# Altium PCB HKCitVDR_PCB.PcbDoc
Units mil, origin at the board's own origin, x right, y up, seen from the top; angles counter-clockwise.
Board outline 6000 x 2500 mil, 4 copper layers (GND, Signal Layer 1, Signal Layer 2, GND (Bottom)), stack 38.234 mil thick; 38 components, 19 nets, 60 pads, 44 vias.
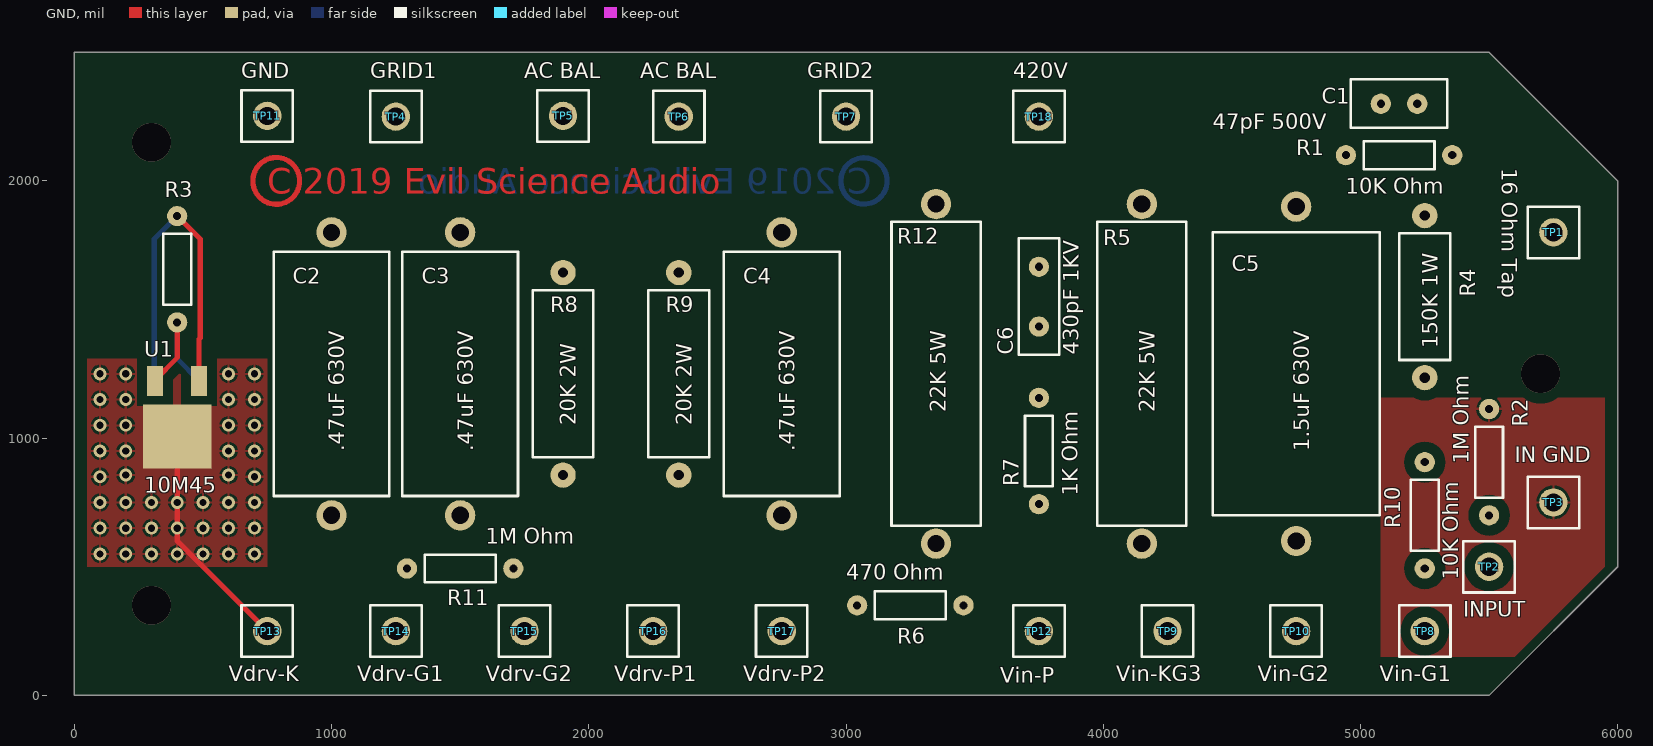
[diagram p0: GND view]
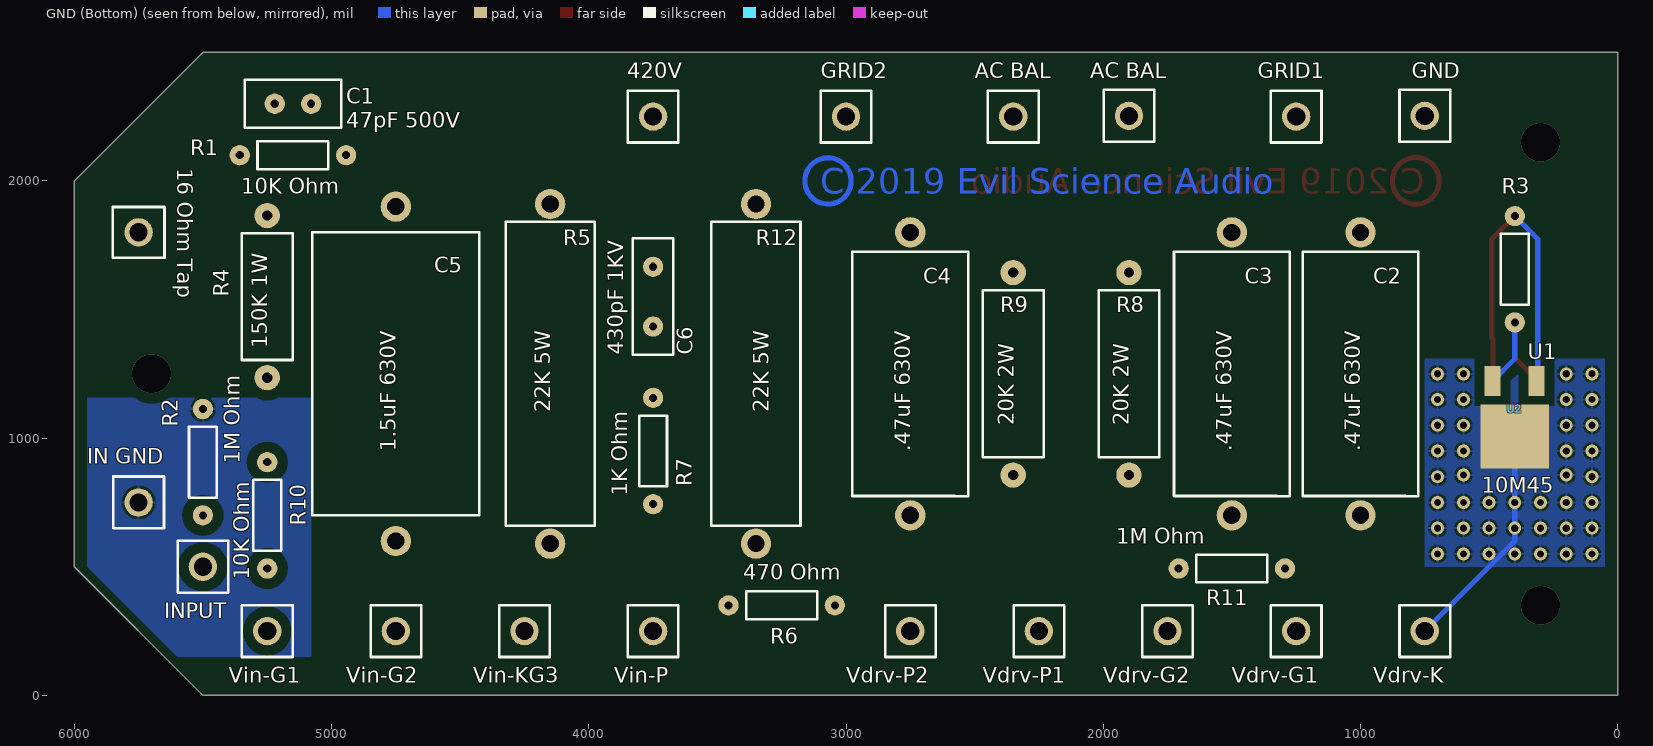
[diagram p1: GND (Bottom) view, seen from below]
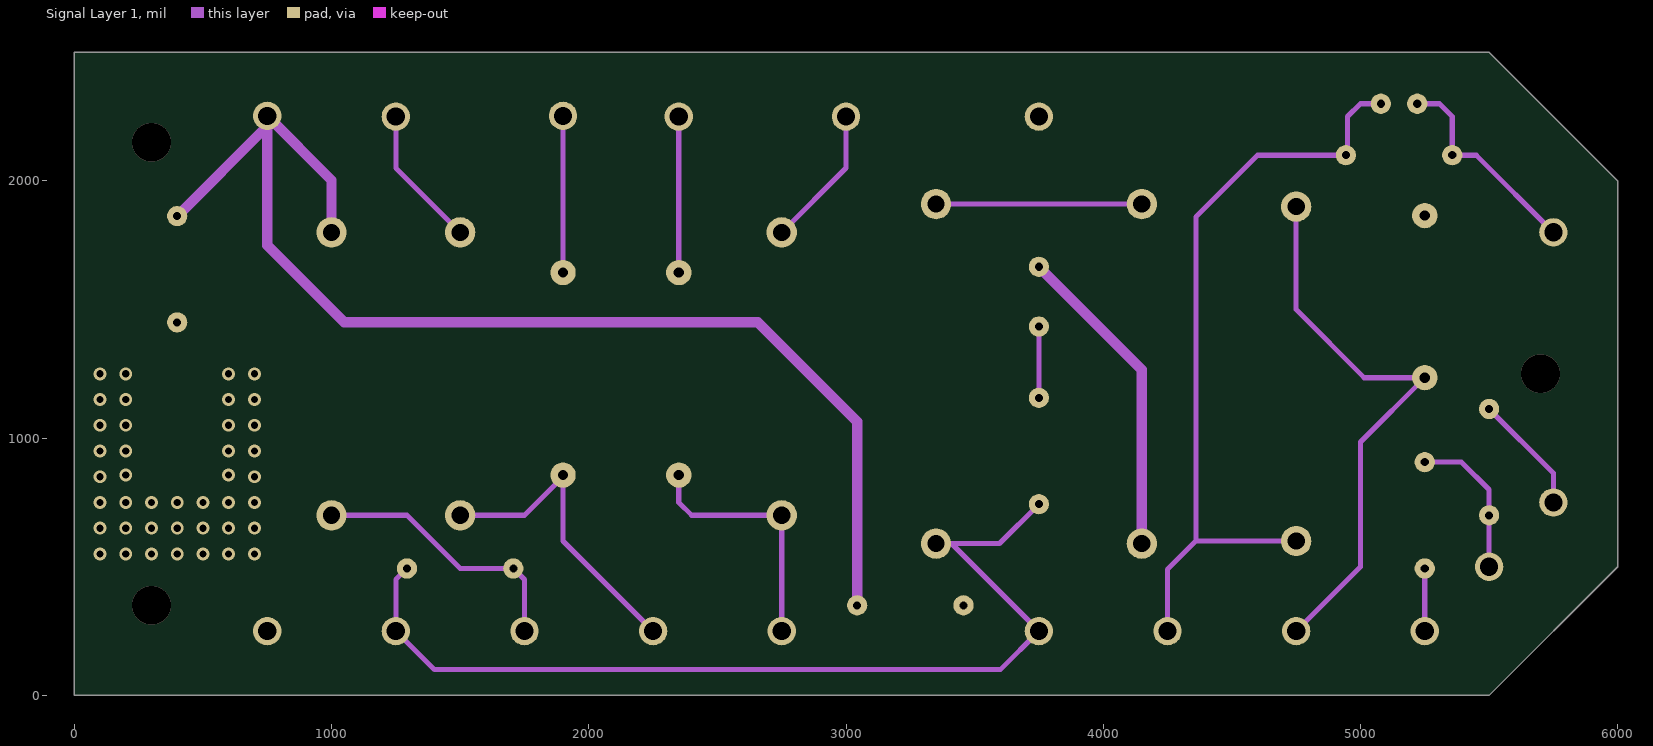
[diagram p2: Signal Layer 1]
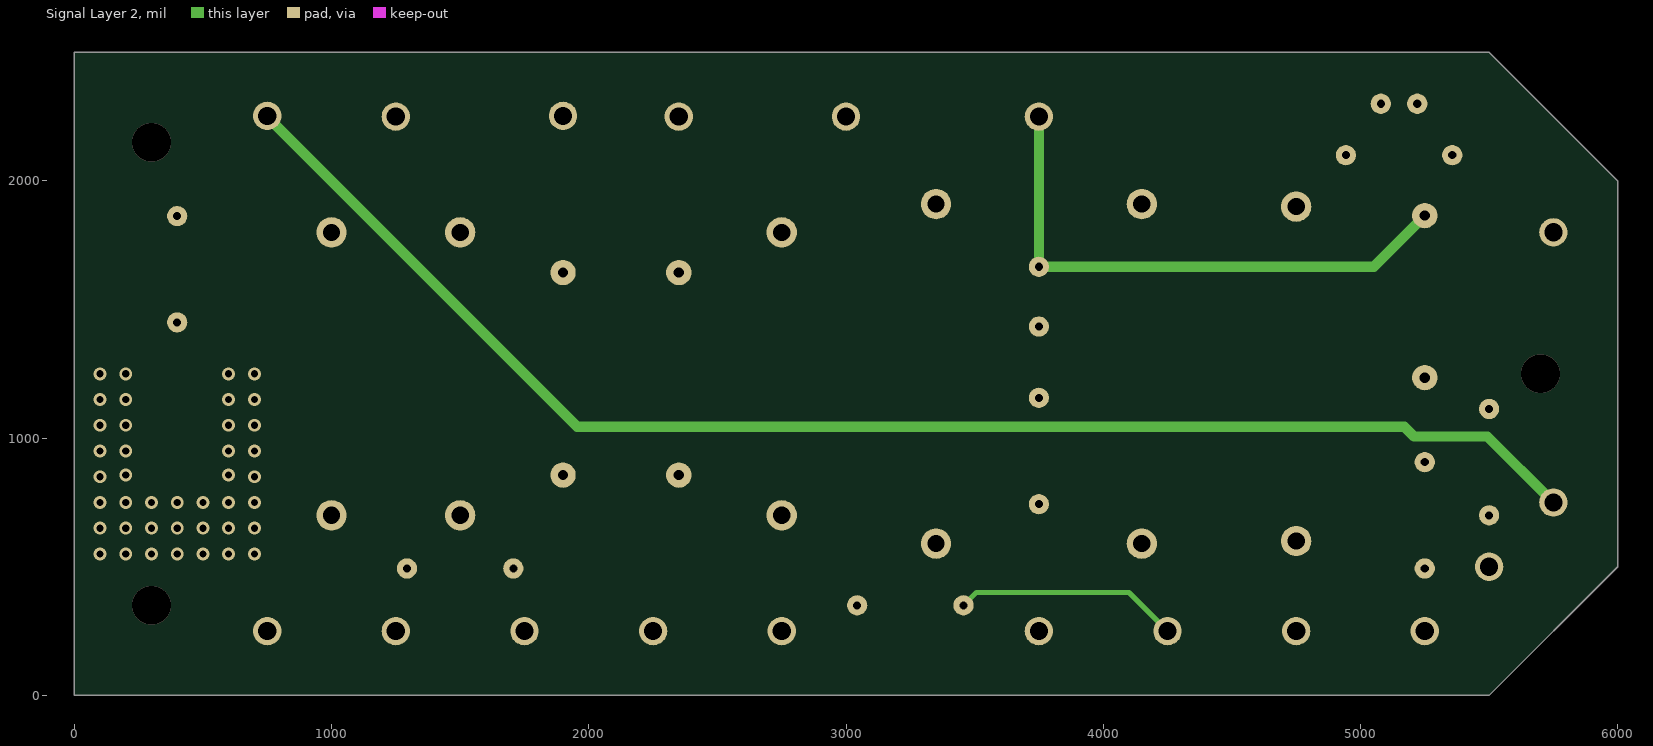
[diagram p3: Signal Layer 2]

## Layer stack, top to bottom
Top Solder: solder mask 0.4, Solder Resist, Dk 3.5
GND: signal copper 1.4
Dielectric 1: dielectric 12.6, FR-4, Dk 4.8
Signal Layer 1: signal copper 1.417
Dielectric 3: dielectric 10, FR-4, Dk 4.2
Signal Layer 2: signal copper 1.417
Dielectric 2: dielectric 10, FR-4, Dk 4.2
GND (Bottom): signal copper 1.4
Bottom Solder: solder mask 0.4, Solder Resist, Dk 3.5

## Board outline
5500,0 6000,500 6000,2000 5500,2500 0,2500 0,0

## Design rules (kind name [scope] priority, off if disabled: settings)
Clearance [All] p1: gap=40 ignorepadtopadclearanceinfootprint=FALSE except(30: SMDPad-SMDPad)
Height [All] p1: minheight=0 maxheight=3000 prefheight=500
HoleSize [All] p1: absolutevalues=TRUE maxlimit=500 minlimit=1 maxpercent=80.000 minpercent=20.000
PolygonConnect PolygonConnect_5 [All vs IsNamedPolygon('Bottom Layer-NetTP13_1') Or  IsNamedPolygon('Top Layer-NetTP13_1')] p1: thpad.connectstyle=Relief thpad.reliefconductorwidth=10 thpad.reliefentries=4 thpad.polygonreliefangle="90 Angle" thpad.airgapwidth=10 smdpad.connectstyle=Direct smdpad.reliefconductorwidth=10 smdpad.reliefentries=4 smdpad.polygonreliefangle="90 Angle" smdpad.airgapwidth=10 via.connectstyle=Relief via.reliefconductorwidth=10 via.reliefentries=4 via.polygonreliefangle="90 Angle" via.airgapwidth=10
PolygonConnect PolygonConnect_4 [All vs IsNamedPolygon('Bottom Layer-NetB+_1')] p2: connectstyle=Direct reliefconductorwidth=10 reliefentries=4 polygonreliefangle="90 Angle" airgapwidth=10
PolygonConnect PolygonConnect_3 [All vs IsNamedPolygon('Bottom Layer-NetD1_A')] p3: connectstyle=Direct reliefconductorwidth=10 reliefentries=4 polygonreliefangle="90 Angle" airgapwidth=10
PolygonConnect PolygonConnect_2 [All vs IsNamedPolygon('NetD1_A')] p4: connectstyle=Direct reliefconductorwidth=10 reliefentries=4 polygonreliefangle="90 Angle" airgapwidth=10
PolygonConnect PolygonConnect_1 [All vs IsNamedPolygon('GND') Or  IsNamedPolygon('NetB+_1')] p5: connectstyle=Direct reliefconductorwidth=10 reliefentries=4 polygonreliefangle="90 Angle" airgapwidth=10
PolygonConnect [All] p6: connectstyle=Relief reliefconductorwidth=10 reliefentries=4 polygonreliefangle="90 Angle" airgapwidth=10
RoutingVias [All] p1: holewidth=28 width=50 viastyle="Through Hole" minholewidth=28 minwidth=50 maxholewidth=28 maxwidth=50
SilkToSilkClearance [All] p1: silktosilkclearance=5
SilkToSolderMaskClearance [IsPad] p1: minsilkscreentomaskgap=5 clearancetoexposedcopper=TRUE
SolderMaskExpansion [All] p1: expansion=4
Width [All] p1: maxlimit=40 minlimit=10 preferedwidth=10
26 further rules are at their usual default settings.

## Components (designator, comment, footprint, x,y, rotation, side; value= is the part's Value field where it differs from the comment)
C1 "47pF 500V" "CDE 47PF MICA" 5150,2300 r0 top value=470000
C2 ".47uF 630V" "SOLEN .47/630" 1000,1250 r90 top value=470000
C3 ".47uF 630V" "SOLEN .47/630" 1500,1250 r90 top value=470000
C4 ".47uF 630V" "SOLEN .47/630" 2750,1250 r90 top value=470000
C5 "1.5uF 630V" "SOLEN 1.5/630" 4750,1250 r90 top value=470000
C6 "430pF 1000V" "CDE 430PF MICA" 3750,1550 r270 top value=470000
R1 "10K" "RES 1/4W THRU_HOLE" 5150,2100 r180 top
R2 "1M" "RES 1/4W THRU_HOLE" 5500,906.69 r90 top
R3 "550R" "RES 1/4W THRU_HOLE" 400,1656.69 r270 top
R4 "150K 1W" "RES 1W THRU_HOLE" 5250,1550 r90 top
R5 "22K 5W" "RES 5W THRU_HOLE" 4150,1250 r270 top
R6 "470R" "RES 1/4W THRU_HOLE" 3250,350 r180 top
R7 "1K" "RES 1/4W THRU_HOLE" 3750,950 r90 top
R8 "20K 2W" "RES 2W THRU_HOLE" 1900,1250 r90 top
R9 "20K 2W" "RES 2W THRU_HOLE" 2350,1250 r90 top
R10 "10K" "RES 1/4W THRU_HOLE" 5250,700 r90 top
R11 "1M" "RES 1/4W THRU_HOLE" 1500,493.31 r0 top
R12 "22K 5W" "RES 5W THRU_HOLE" 3350,1250 r90 top
TP1 "16 Ohm Tap" TEST_POINT 5600,1500 r270 top
TP2 "INPUT" TEST_POINT 5800,350 r0 top
TP3 "IN GND" TEST_POINT 6050,600 r0 top
TP4 "GRID1" TEST_POINT 1550,2100 r0 top
TP5 "AC BAL" TEST_POINT 2200,2102.78 r0 top
TP6 "AC BAL" TEST_POINT 2650,2100 r0 top
TP7 "GRID2" TEST_POINT 3300,2100 r0 top
TP8 "Vin-G1" TEST_POINT 5550,100 r0 top
TP9 "Vin-KG3" TEST_POINT 4550,100 r0 top
TP10 "Vin-G2" TEST_POINT 5050,100 r0 top
TP11 "GND" Test_Point 1050,2102.78 r0 top
TP12 "Vin-P" TEST_POINT 4050,100 r0 top
TP13 "Vdrv-K" TEST_POINT 1050,100 r0 top
TP14 "Vdrv-G1" TEST_POINT 1550,100 r0 top
TP15 "Vdrv-G2" TEST_POINT 2050,100 r0 top
TP16 "Vdrv-P1" TEST_POINT 2550,100 r0 top
TP17 "Vdrv-P2" TEST_POINT 3050,100 r0 top
TP18 "420V" TEST_POINT 4050,2100 r0 top
U1 "10M45" TO-252AA 399.02,1129.72 r90 top
U2 "10M45" TO-252AA 400.98,1129.72 r90 bottom

## Footprints (in the part's own frame and the unit in brackets; to place one, negate y for a bottom-side part, rotate by r counter-clockwise, add the part's x,y. Pads: shape width x height; smd on the part's side, far side on the other; paste and mask are expansions set on the pad)
"CDE 47PF MICA" [mm] "MICA THRU-HOLE"
  round 2 hole 0.8: 1(-1.8,0) 2(1.8,0)
  silkscreen extent -4.75,-2.37 4.75,2.4
"CDE 430PF MICA" [mm] "MICA THRU-HOLE"
  round 2 hole 0.8: 1(-2.95,0) 2(2.95,0)
  silkscreen extent -5.75,-2 5.75,2.03
"RES 1/4W THRU_HOLE" [mm] "1/4W RES through-hole"
  round 2 hole 0.8: 1(-5.25,0) 2(5.25,0)
  silkscreen extent -3.5,-1.38 3.5,1.38
"RES 1W THRU_HOLE" [mm] "1W RES through-hole"
  round 2.5 hole 1: 1(-8,0) 2(8,0)
  silkscreen extent -6.25,-2.5 6.25,2.5
"RES 2W THRU_HOLE" [mm] "2W RES through-hole"
  round 2.5 hole 1: 1(-10,0) 2(10,0)
  silkscreen extent -8.25,-3 8.25,3
"RES 5W THRU_HOLE" [mm] "5W RES through-hole"
  round 3 hole 1.7: 1(-16.764,0) 2(16.764,0)
  silkscreen extent -15,-4.4 15,4.4
"SOLEN 1.5/630" [mm] "Film Cap through-hole"
  round 3 hole 1.7: 1(-16.51,0) 2(16.51,0)
  silkscreen extent -13.97,-8.26 13.97,8.26
"SOLEN .47/630" [mm] "Film Cap through-hole"
  round 3 hole 1.7: 1(-13.97,0) 2(13.97,0)
  silkscreen extent -12.06,-5.72 12.06,5.72
TEST_POINT [mm] "Test or Wire Point"
  round 2.8 hole 1.8: 1(-7.62,3.81)
  silkscreen extent -10.16,1.27 -5.08,6.35
Test_Point [mm] "Test or Wire Point"
  round 2.8 hole 1.8: 1(-7.62,3.81)
  silkscreen extent -10.16,1.27 -5.08,6.35
TO-252AA [mm]
  rect 3x1.6 smd: 1(2.35,-2.175) 3(2.35,2.175)
  rect 6.3x6.8 smd: 2(-3.125,-0.025)

## Part data
C1 C2 C3 C4 C5 C6: library part CAP_6, "Capacitor", Mfg Part Num=C3216X7R1H474K, AMAT Stuff=Yes, BASF Stuff=Yes, Line=26, MyPartType=C, OutputSort=0, PartType=C
R1 R2 R3 R4 R5 R6 R7 R8 R9 R10 R11 R12: library part RES_THRU
TP1 TP2 TP3 TP4 TP5 TP6 TP7 TP8 TP9 TP10 TP11 TP12 TP13 TP14 TP15 TP16 TP17 TP18: library part Test_Point1

## Via types
v1: diameter 50, hole 28, GND to GND (Bottom), tented both sides, 41 vias
v2: diameter 150, hole 150, GND to GND (Bottom), 3 vias

## Nets (pads, with @x,y where several pads share a name; then routed paths per layer and width w, separated by ;. In a path a pad name is that pad's centre, name@x,y a point inside that pad or via, vN(x,y) a via of type N, cw(c..) or ccw(c..) an arc to the next point about the centre after c; other vN are vias at no path point)
GND: C2.2 R2.2 R3.1 R6.2 TP3.1 TP11.1 U1.1 U2.1 | length 12301.2
  GND w20: R3.1 489.37,1774.02 489.37,1389.37 484.65,1384.65 U1.1
  Signal Layer 1 w20: TP11.1@750,2213.39 TP11.1 ; R2.2 5750,863.39 TP3.1
  Signal Layer 1 w40: R3.1 750,2213.39 750,1750 1050,1450 2656.69,1450 3043.31,1063.39 R6.2 ; TP11.1 1000,2002.78 C2.2
  Signal Layer 2 w20: TP11.1@750,2250 TP11.1
  Signal Layer 2 w40: TP11.1@750,2250 1955.51,1044.49 5170.41,1044.49 5208.84,1006.06 5493.94,1006.06 TP3.1
  GND (Bottom) w20: U2.1@310.63,1222.24 U2.1 310.63,1226.97 310.63,1774.02 R3.1
NetC1_1: C1.1 C5.1 R1.2 R6.1 TP9.1 | length 3907
  Signal Layer 1 w20: TP9.1 4250,490 4360,600 ; C5.1 4360,600 ; C1.1 5000,2300 4950,2250 4950,2106.69 R1.2 4600,2100 4360,1860 4360,600
  Signal Layer 2 w20: R6.1 3506.69,400 4100,400 TP9.1
NetC1_2: C1.2 R1.1 TP1.1 | length 824.1
  Signal Layer 1 w20: C1.2 5306.69,2300 5356.69,2250 R1.1 5450,2100 TP1.1
NetC2_1: C2.1 R11.2 TP15.1 | length 1053.6
  Signal Layer 1 w20: C2.1 1293.31,700 1500,493.31 R11.2 1750,450 TP15.1
NetC3_1: C3.1 R8.1 TP16.1 | length 1213.4
  Signal Layer 1 w20: C3.1 1750,700 R8.1@1900,850 ; R8.1 R8.1@1900,850 ; TP16.1 1900,600 R8.1@1900,850
NetC3_2: C3.2 TP4.1 | length 553.6
  Signal Layer 1 w20: TP4.1 1250,2050 C3.2
NetC4_1: C4.1 R9.1 TP17.1 | length 977
  Signal Layer 1 w20: R9.1 2350,750 2400,700 C4.1 TP17.1
NetC4_2: C4.2 TP7.1 | length 553.6
  Signal Layer 1 w20: C4.2 3000,2050 TP7.1
NetC5_2: C5.2 R4.1 TP10.1 | length 2201.9
  Signal Layer 1 w20: TP10.1 5000,500 5000,985.04 R4.1 5014.96,1235.04 4750,1500 C5.2
NetC6_1: C6.1 R4.2 R5.2 TP18.1 | length 3408
  Signal Layer 1 w40: C6.1 4150,1266.14 R5.2
  Signal Layer 2 w40: TP18.1 C6.1 5051.18,1666.14 R4.2
NetC6_2: C6.2 R7.2 | length 277.2
  Signal Layer 1 w20: R7.2 C6.2
NetR2_1: R2.1 R10.2 TP2.1 | length 594.2
  Signal Layer 1 w20: R10.2 5393.31,906.69 5500,800 R2.1 TP2.1
NetR3_2: R3.2 U1.3 U2.3 | length 527.3
  GND w20: U1.3 313.39,1226.27 400,1312.89 R3.2
  GND (Bottom) w20: R3.2 400,1308.86 U2.3
NetR5_1: R5.1 R12.2 | length 800
  Signal Layer 1 w20: R12.2 R5.1
NetR7_1: R7.1 R11.1 R12.1 TP12.1 TP14.1 | length 3844
  Signal Layer 1 w20: R11.1 1250,450 TP14.1 1400,100 3600,100 TP12.1 3410,590 ; R12.1 3410,590 ; R7.1 3596.69,590 3410,590
  GND (Bottom) w20: R12.1@3340,600 R12.1
NetR8_2: R8.2 TP5.1 | length 609.1
  Signal Layer 1 w20: R8.2 TP5.1
NetR9_2: R9.2 TP6.1 | length 606.3
  Signal Layer 1 w20: R9.2 TP6.1
NetR10_1: R10.1 TP8.1 | length 243.3
  Signal Layer 1 w20: TP8.1 R10.1
NetTP13_1: TP13.1 U1.2 U2.2 | length 1803.3
  GND w20: U1.2 400,600 TP13.1
  GND (Bottom) w20: U2.2 400,600 TP13.1
  other v1: 100,550 200,550 300,550 400,550 500,550 600,550 700,550 100,650 200,650 300,650 400,650 500,650 600,650 700,650 100,750 200,750 300,750 400,750 500,750 600,750 700,750 100,850 700,850 200,856.3 600,856.3 100,950 200,950 600,950 700,950 100,1050 200,1050 600,1050 700,1050 100,1150 200,1150 600,1150 700,1150 100,1250 200,1250 600,1250 700,1250
copper on no net: | length 1136.6
  GND w20: 875.9,2000 ccw(c785,2000) 875.9,2000
  GND (Bottom) w20: 3160,2000 ccw(c3070,2000) 3160,2000
  other v2: 300,350 5700,1250 300,2150

## Polygon pours and split planes (outlines as drawn)
GND on GND "GND-GND" (solid, pour order 4): 5079.13,1156.69 5079.13,150 5600,150 5950,500 5950,1156.69
NetTP13_1 on GND "Top Layer-NetTP13_1" (solid, pour order 0): 50,500 750,500 750,1308.86 50,1308.86
no net on GND "GND-No Net" (solid, pour order 6): -350,1863.39
GND on GND (Bottom) "GND-GND 1" (solid, pour order 8): 5079.13,1156.69 5079.13,150 5600,150 5950,500 5950,1156.69
NetTP13_1 on GND (Bottom) "Bottom Layer-NetTP13_1" (solid, pour order 2): 50,1308.86 50,500 743.31,500 750,493.31 750,1308.86

## Other copper
GND:
  text "C 2019 Evil Science Audio" at 750,1950 h100
GND (Bottom):
  text "C 2019 Evil Science Audio" at 3100,1950 h100

## Silkscreen, mask and mechanical layers (free items; w line width, h text height)
Top Overlay:
  text "47pF 500V" at 4425,2200 h60
  text "10K Ohm" at 4943.31,1950 h60
  text "430pF 1KV" at 3905,1323.62 h60 r90
  text "1M Ohm" at 5420,900 h60 r90
  text "1K Ohm" at 3900,775.23 h60 r90
  text "1M Ohm" at 1600,590 h60
  text "470 Ohm" at 3000,450 h60
  text "10K Ohm" at 5380,450 h60 r90
Bottom Overlay:
  text "GND" at 800,2400 h60
  text "GRID1" at 1400,2400 h60
  text "AC BAL" at 2050,2400 h60
  text "AC BAL" at 2500,2400 h60
  text "GRID2" at 3098.23,2400 h60
  text "420V" at 3850,2400 h60
  text "C1" at 4943.31,2300 h60
  text "47pF 500V" at 4943.31,2206.5 h60
  text "R1" at 5550,2100 h60
  text "16 Ohm Tap" at 5600,2050 h60 r90
  text "R3" at 450,1950 h60
  text "10K Ohm" at 5350,1950 h60
  text "R12" at 3350,1750 h60
  text "R5" at 4100,1750 h60
  text "C5" at 4600,1643.7 h60
  text "C2" at 950,1600 h60
  text "C3" at 1450,1600 h60
  text "C4" at 2700,1600 h60
  text "R4" at 5400,1550 h60 r270
  text "R8" at 1950,1490 h60
  text "R9" at 2400,1490 h60
  text "150K 1W" at 5250,1350 h60 r270
  text "C6" at 3595,1323.62 h60 r270
  text "430pF 1KV" at 3865,1323.62 h60 r270
  text "U1" at 350,1306.69 h60
  text "22K 5W" at 3300,1100 h60 r270
  text "22K 5W" at 4150,1100 h60 r270
  text "20K 2W" at 1900,1050 h60 r270
  text "20K 2W" at 2348.23,1050 h60 r270
  text "R2" at 5598.23,1044.49 h60 r270
  text ".47uF 630V" at 1000,950 h60 r270
  text ".47uF 630V" at 1500,950 h60 r270
  text ".47uF 630V" at 2750,950 h60 r270
  text "1.5uF 630V" at 4750,950 h60 r270
  text "1M Ohm" at 5356.69,900 h60 r270
  text "IN GND" at 5950,900 h60
  text "R7" at 3600,812.2 h60 r270
  text "1K Ohm" at 3850,775.23 h60 r270
  text "R10" at 5100,659.45 h60 r270
  text "1M Ohm" at 1950,590 h60
  text "470 Ohm" at 3400,450 h60
  text "10K Ohm" at 5320,450 h60 r270
  text "R11" at 1600,350.98 h60
  text "INPUT" at 5650,300 h60
  text "R6" at 3294.7,200 h60
  text "Vdrv-K" at 950,50 h60
  text "Vdrv-G1" at 1500,50 h60
  text "Vdrv-G2" at 2000,50 h60
  text "Vdrv-P1" at 2468.11,50 h60
  text "Vdrv-P2" at 3000,50 h60
  text "Vin-P" at 3900,50 h60
  text "Vin-KG3" at 4450,50 h60
  text "Vin-G2" at 4943.31,50 h60
  text "Vin-G1" at 5400,50 h60
Top Solder:
  circle w20: c785,2000 r90
  text "C 2019 Evil Science Audio" at 750,1950 h100
Bottom Solder:
  circle w20: c3070,2000 r90
  text "C 2019 Evil Science Audio" at 3100,1950 h100
Mechanical 15:
  the board outline again, w20